# EAGLE board Xonik Waveshaper v2.3 (EAGLE 9.6.2)
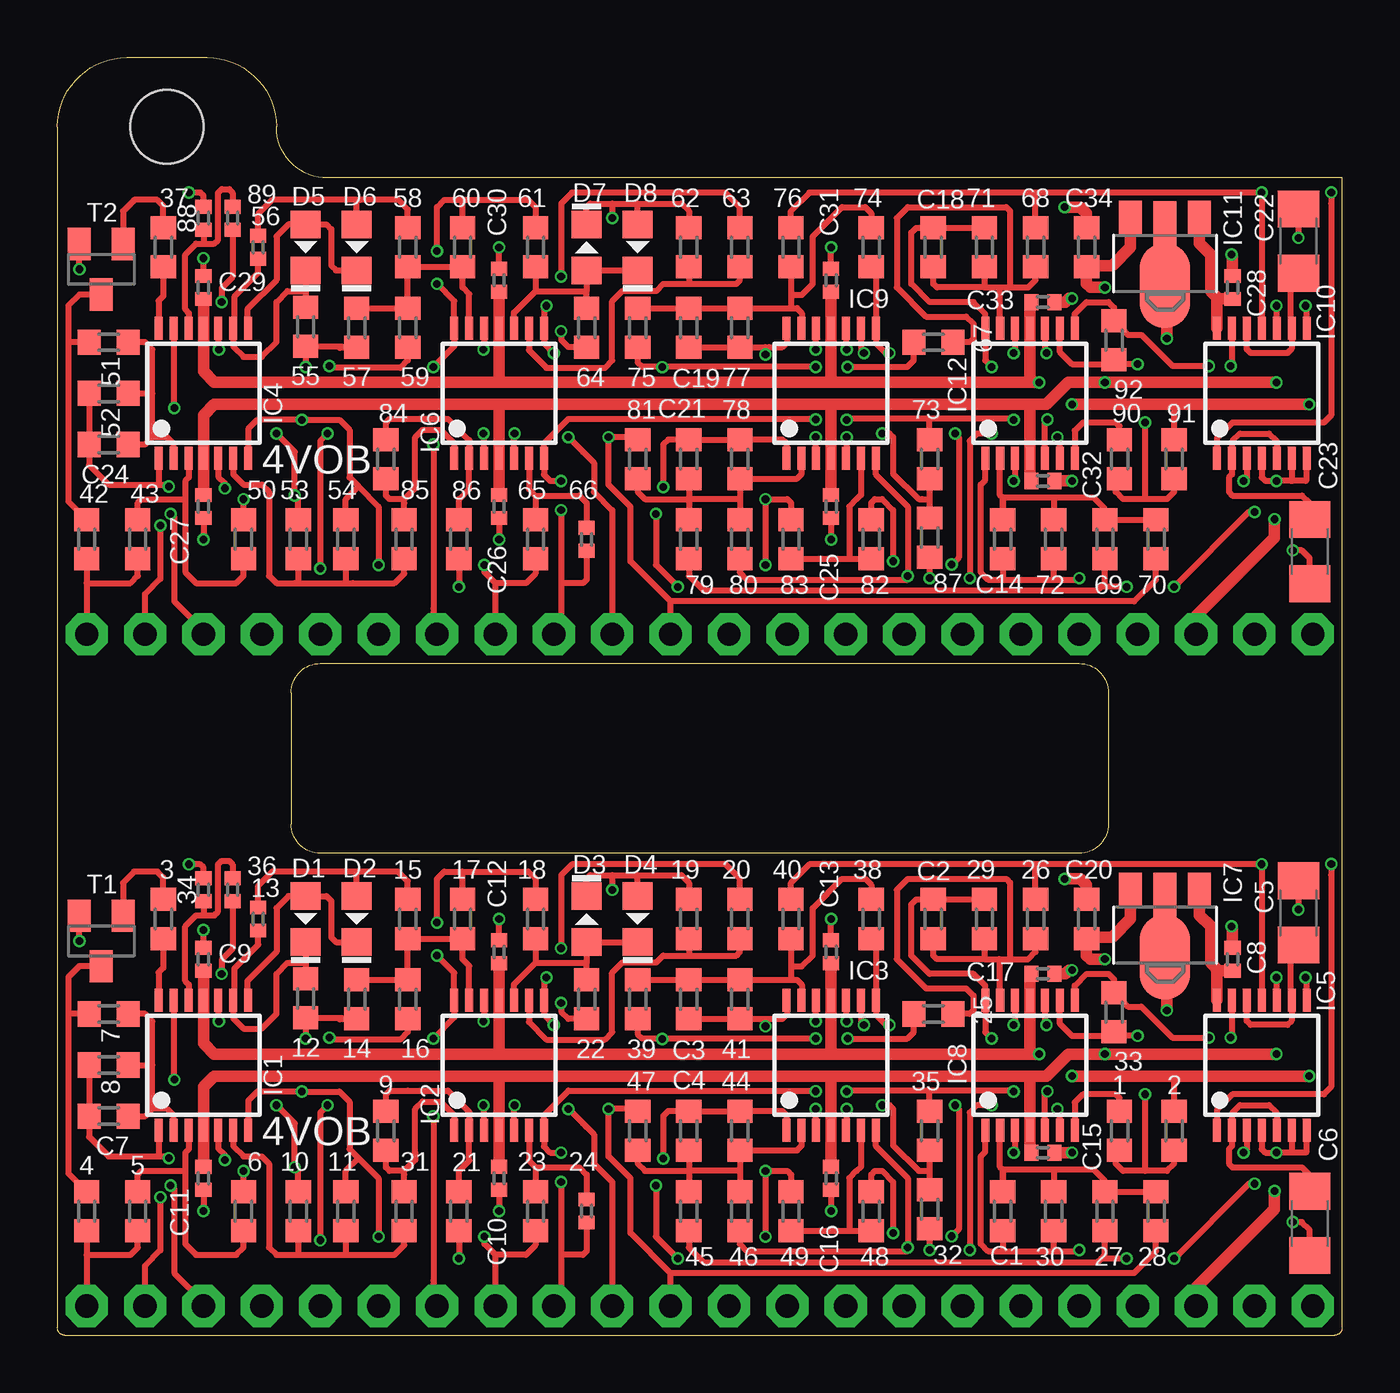
[diagram p0: board, top side]
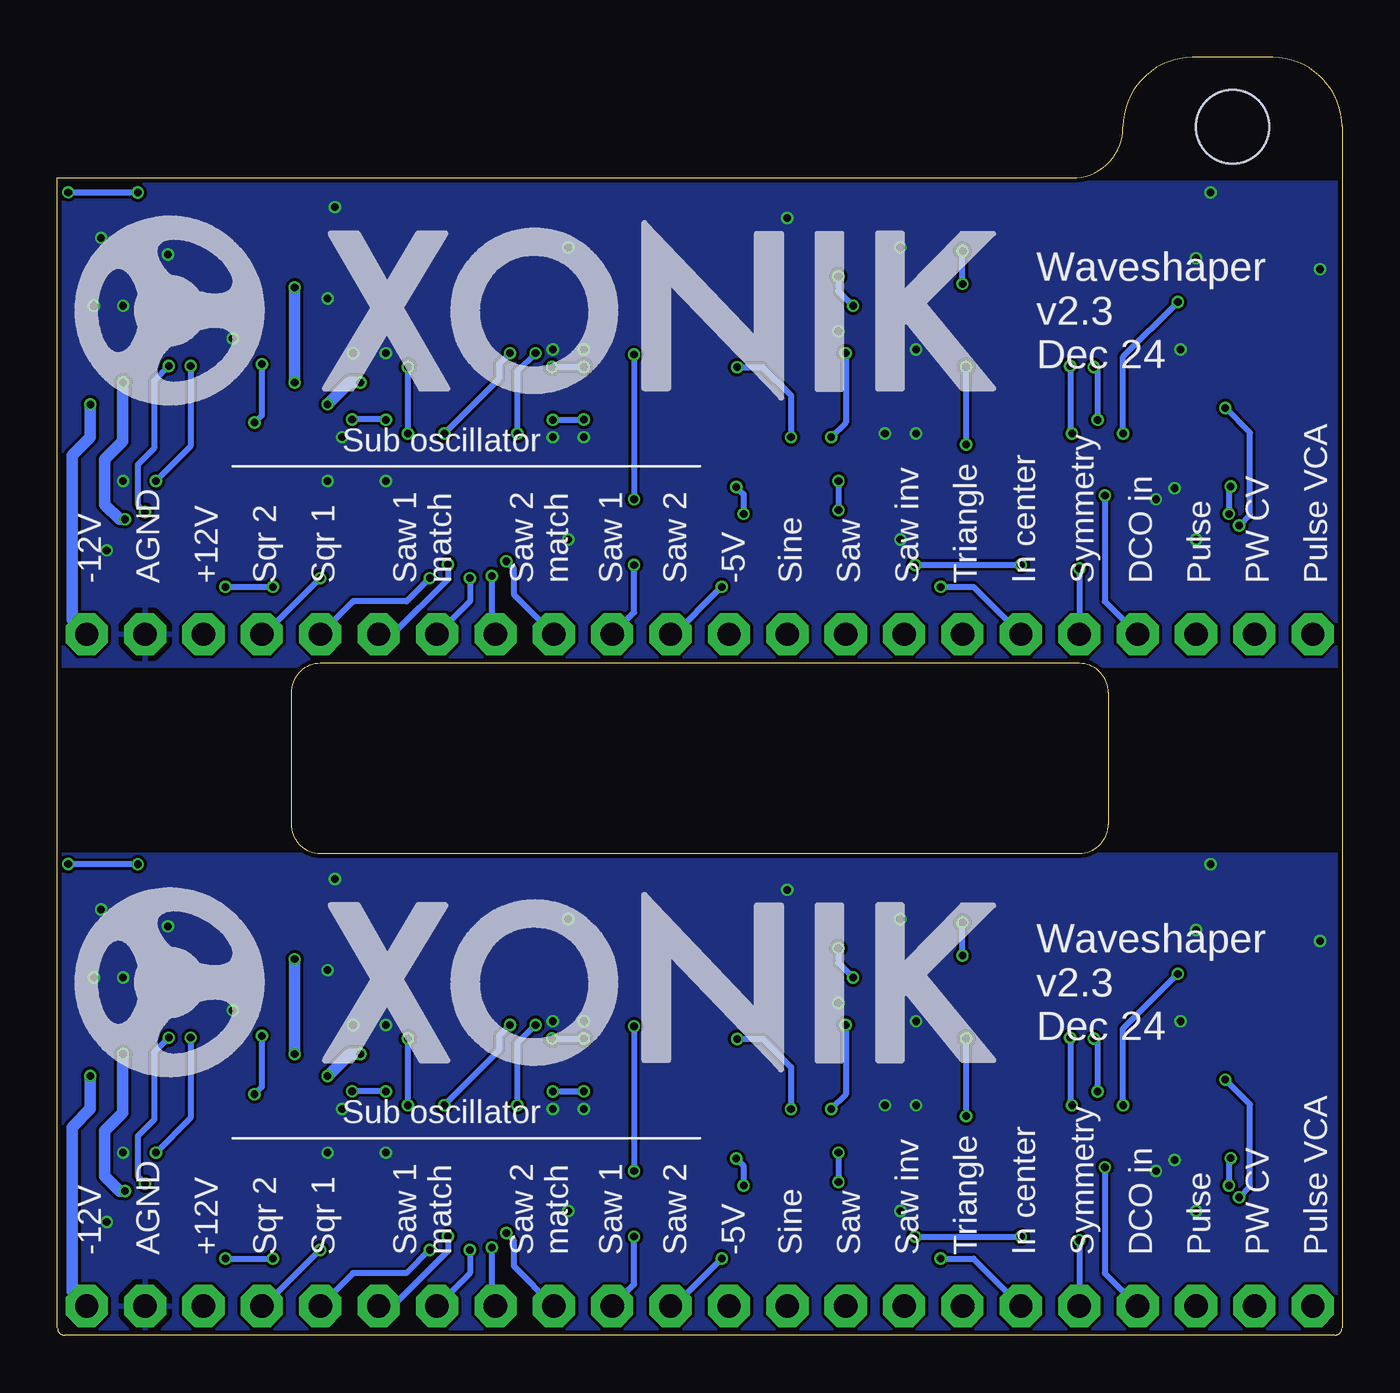
[diagram p1: board, bottom side, seen from below]

Size 55.88 x 55.56 mm. Coordinates in mm from the lower left corner, seen from the top.
Outline: 0.32,0 55.56,0 arc90 55.88,0.32 55.88,50.32 11.75,50.32 arc-90 9.53,52.55 arc90 6.51,55.56 3.02,55.56 arc90 0,52.55 0,0.32 arc90 0.32,0
Outline: 44.45,20.95 11.43,20.95 arc-90 10.16,22.23 10.16,27.94 arc-90 11.43,29.21 44.45,29.21 arc-90 45.72,27.94 45.72,22.23 arc-90 44.45,20.95
Copper layers (1*16): Top 0.035mm / dielectric 1.6mm / Bottom 0.035mm
Design rules "jlcpcb-2layers *": minimum track width 5mil, minimum drill 0.3mm, track to track 5mil, track to pad 5mil, pad to pad 5mil, via to via 5mil, smd to smd 5mil, copper to edge 0.2mm, drill to drill 6mil, minimum pad ring 10mil, minimum via ring 4mil, stop-mask expansion 4mil, vias tented up to drill 0mil, thermal gap 10mil
Holes 3.2 mm at 4.76,52.55

## Footprints (pad centres in the part's own frame; a part is rotated, then mirrored left to right if it is on the bottom)
R0603 = smd 1 x 1.1: 1 -0.85,0; 2 0.85,0
R0402 = smd 0.6 x 0.7: 1 -0.5,0; 2 0.5,0
C0603-J = smd 1 x 1.1: 1 -0.85,0; 2 0.85,0
C1206 = smd 1.6 x 1.8: 1 -1.4,0; 2 1.4,0
C0402-J = smd 0.6 x 0.7: 1 -0.5,0; 2 0.5,0
D0805-J = smd 1.2 x 1.3: A 1,0; C -1,0
TSSOP14J = smd 0.35 x 1: 1 -1.95,-2.825; 2 -1.3,-2.825; 3 -0.65,-2.825; 4 0,-2.825; 5 0.65,-2.825; 6 1.3,-2.825; 7 1.95,-2.825; 8 1.95,2.825; 9 1.3,2.825; 10 0.65,2.825; 11 0,2.825; 12 -0.65,2.825; 13 -1.3,2.825; 14 -1.95,2.825
SOT89 = smd 1 x 1.5: 1 -1.499,-1.981; 3 1.499,-1.981 | smd 1 x 2: 2 0,-1.727 | smd 2.2 x 3.7: 2@1 0,0.94
SOT23-BEC = smd 1 x 1.4: B -0.95,-1.1; C 0,1.1; E 0.95,-1.1
MA22N-1J = drill 1.016 octagon: 1 -26.67,0; 2 -24.13,0; 3 -21.59,0; 4 -19.05,0; 5 -16.51,0; 6 -13.97,0; 7 -11.43,0; 8 -8.89,0; 9 -6.35,0; 10 -3.81,0; 11 -1.27,0; 12 1.27,0; 13 3.81,0; 14 6.35,0; 15 8.89,0; 16 11.43,0; 17 13.97,0; 18 16.51,0; 19 19.05,0; 20 21.59,0; 21 24.13,0; 22 26.67,0

## Placement (x,y rotation side)
1  100k  [R0603]  46.2,8.89 270 top
2  100k  [R0603]  48.58,8.89 270 top
3  68k  [R0603]  4.6,18.1 270 top
4  1k  [R0603]  1.27,5.4 270 top
5  200k  [R0603]  3.49,5.4 270 top
6  100k  [R0603]  8.1,5.4 90 top
7  100k  [R0603]  2.22,13.97 0 top
8  200k  [R0603]  2.22,11.75 180 top
9  30k  [R0603]  14.29,8.89 270 top
10  27k  [R0603]  10.48,5.4 270 top
11  27k  [R0603]  12.54,5.4 90 top
12  100k  [R0603]  10.79,14.64 90 top
13  100k  [R0402]  8.73,18.1 90 top
14  100k  [R0603]  13.02,14.61 90 top
15  50k  [R0603]  15.24,18.1 90 top
16  100k  [R0603]  15.24,14.61 270 top
17  200k  [R0603]  17.62,18.1 270 top
18  150k  [R0603]  20.8,18.1 90 top
19  1k2  [R0603]  27.46,18.1 90 top
20  15k  [R0603]  29.69,18.1 270 top
21  15k  [R0603]  17.46,5.4 90 top
22  22k  [R0603]  23.02,14.61 270 top
23  100k  [R0603]  20.8,5.4 90 top
24  100k  [R0402]  23.02,5.4 270 top
25  20k  [R0603]  38.1,13.97 0 top
26  10k  [R0603]  42.55,18.1 270 top
27  10k  [R0603]  45.56,5.4 90 top
28  20k  [R0603]  47.78,5.4 90 top
29  20k  [R0603]  40.32,18.1 90 top
30  20k  [R0603]  43.34,5.4 270 top
31  27k  [R0603]  15.08,5.4 270 top
32  33k  [R0603]  37.94,5.48 270 top
33  20k  [R0603]  45.96,14.05 90 top
34  100k  [R0402]  6.35,19.37 90 top
35  100k  [R0603]  37.94,8.89 270 top
36  100k  [R0402]  7.62,19.37 90 top
37  68k  [R0603]  4.6,47.31 270 top
38  49.9k  [R0603]  35.4,18.1 270 top
39  100k  [R0603]  25.24,14.61 270 top
40  50k  [R0603]  31.91,18.1 270 top
41  49.9k  [R0603]  29.69,14.61 270 top
42  1k  [R0603]  1.27,34.61 270 top
43  200k  [R0603]  3.49,34.61 270 top
44  49.9k  [R0603]  29.69,8.89 90 top
45  50k  [R0603]  27.46,5.4 270 top
46  49.9k  [R0603]  29.69,5.4 270 top
47  100k  [R0603]  25.24,8.89 90 top
48  33k  [R0603]  35.4,5.4 270 top
49  100k  [R0603]  31.91,5.4 270 top
50  100k  [R0603]  8.1,34.61 90 top
51  100k  [R0603]  2.22,43.18 0 top
52  200k  [R0603]  2.22,40.96 180 top
53  27k  [R0603]  10.48,34.61 270 top
54  27k  [R0603]  12.54,34.61 90 top
55  100k  [R0603]  10.79,43.85 90 top
56  100k  [R0402]  8.73,47.31 90 top
57  100k  [R0603]  13.02,43.81 90 top
58  50k  [R0603]  15.24,47.31 90 top
59  100k  [R0603]  15.24,43.81 270 top
60  200k  [R0603]  17.62,47.31 270 top
61  150k  [R0603]  20.8,47.31 90 top
62  1k2  [R0603]  27.46,47.31 90 top
63  15k  [R0603]  29.69,47.31 270 top
64  22k  [R0603]  23.02,43.81 270 top
65  100k  [R0603]  20.8,34.61 90 top
66  100k  [R0402]  23.02,34.61 270 top
67  20k  [R0603]  38.1,43.18 0 top
68  10k  [R0603]  42.55,47.31 270 top
69  10k  [R0603]  45.56,34.61 90 top
70  20k  [R0603]  47.78,34.61 90 top
71  20k  [R0603]  40.32,47.31 90 top
72  20k  [R0603]  43.34,34.61 270 top
73  100k  [R0603]  37.94,38.1 270 top
74  49.9k  [R0603]  35.4,47.31 270 top
75  100k  [R0603]  25.24,43.81 270 top
76  50k  [R0603]  31.91,47.31 270 top
77  49.9k  [R0603]  29.69,43.81 270 top
78  49.9k  [R0603]  29.69,38.1 90 top
79  50k  [R0603]  27.46,34.61 270 top
80  49.9k  [R0603]  29.69,34.61 270 top
81  100k  [R0603]  25.24,38.1 90 top
82  33k  [R0603]  35.4,34.61 270 top
83  100k  [R0603]  31.91,34.61 270 top
84  30k  [R0603]  14.29,38.1 270 top
85  27k  [R0603]  15.08,34.61 270 top
86  15k  [R0603]  17.46,34.61 90 top
87  33k  [R0603]  37.94,34.69 270 top
88  100k  [R0402]  6.35,48.58 90 top
89  100k  [R0402]  7.62,48.58 90 top
90  100k  [R0603]  46.2,38.1 270 top
91  100k  [R0603]  48.58,38.1 270 top
92  20k  [R0603]  45.96,43.26 90 top
C1  10pF  [C0603-J]  41.12,5.4 270 top
C2  10pF  [C0603-J]  38.1,18.1 90 top
C3  30pF  [C0603-J]  27.46,14.61 270 top
C4  30pF  [C0603-J]  27.46,8.89 90 top
C5  100nF  [C1206]  53.98,18.36 270 top
C6  100nF  [C1206]  54.48,4.86 90 top
C7  3pF  [C0603-J]  2.22,9.53 180 top
C8  1uF  [C0402-J]  51.12,16.35 270 top
C9  1uF  [C0402-J]  6.35,16.35 90 top
C10  1uF  [C0402-J]  19.21,6.83 90 top
C11  1uF  [C0402-J]  6.35,6.83 90 top
C12  1uF  [C0402-J]  19.21,16.67 90 top
C13  1uF  [C0402-J]  33.66,16.67 90 top
C14  10pF  [C0603-J]  41.12,34.61 270 top
C15  1uF  [C0402-J]  42.86,7.94 180 top
C16  1uF  [C0402-J]  33.66,6.83 90 top
C17  1uF  [C0402-J]  42.86,15.72 0 top
C18  10pF  [C0603-J]  38.1,47.31 90 top
C19  30pF  [C0603-J]  27.46,43.81 270 top
C20  0.33uF  [C0603-J]  44.77,18.1 270 top
C21  30pF  [C0603-J]  27.46,38.1 90 top
C22  100nF  [C1206]  53.98,47.57 270 top
C23  100nF  [C1206]  54.48,34.07 90 top
C24  3pF  [C0603-J]  2.22,38.73 180 top
C25  1uF  [C0402-J]  33.66,36.04 90 top
C26  1uF  [C0402-J]  19.21,36.04 90 top
C27  1uF  [C0402-J]  6.35,36.04 90 top
C28  1uF  [C0402-J]  51.12,45.56 270 top
C29  1uF  [C0402-J]  6.35,45.56 90 top
C30  1uF  [C0402-J]  19.21,45.88 90 top
C31  1uF  [C0402-J]  33.66,45.88 90 top
C32  1uF  [C0402-J]  42.86,37.15 180 top
C33  1uF  [C0402-J]  42.86,44.93 0 top
C34  0.33uF  [C0603-J]  44.77,47.31 270 top
D1  1N41480805  [D0805-J]  10.79,18.1 90 top
D2  1N41480805  [D0805-J]  13.02,18.1 90 top
D3  1N41480805  [D0805-J]  23.02,18.1 270 top
D4  1N41480805  [D0805-J]  25.24,18.1 90 top
D5  1N41480805  [D0805-J]  10.79,47.31 90 top
D6  1N41480805  [D0805-J]  13.02,47.31 90 top
D7  1N41480805  [D0805-J]  23.02,47.31 270 top
D8  1N41480805  [D0805-J]  25.24,47.31 90 top
IC1  TL074JT  [TSSOP14J]  6.35,11.75 0 top
IC2  TL074JT  [TSSOP14J]  19.21,11.75 0 top
IC3  TL074JT  [TSSOP14J]  33.66,11.75 0 top
IC4  TL074JT  [TSSOP14J]  6.35,40.96 0 top
IC5  4013T  [TSSOP14J]  52.39,11.75 0 top
IC6  TL074JT  [TSSOP14J]  19.21,40.96 0 top
IC7  78L05F  [SOT89]  48.18,17.38 180 top
IC8  TL074JT  [TSSOP14J]  42.31,11.75 0 top
IC9  TL074JT  [TSSOP14J]  33.66,40.96 0 top
IC10  4013T  [TSSOP14J]  52.39,40.96 0 top
IC11  78L05F  [SOT89]  48.18,46.59 180 top
IC12  TL074JT  [TSSOP14J]  42.31,40.96 0 top
T1  2n3904  [SOT23-BEC]  1.91,17.14 180 top
T2  2n3904  [SOT23-BEC]  1.91,46.35 180 top
U$1  [XONIK_LOGO_40]  55.09,11.27 0 bottom
U$2  [XONIK_LOGO_40]  55.09,40.48 0 bottom
X1  [MA22N-1J]  27.94,1.27 0 top
X2  [MA22N-1J]  27.94,30.48 0 top

## Library data of the parts
1-92 = rcl; SPICEPREFIX: R
C1-C4 C7-C21 C24-C34 D1-D8 IC1-IC6 IC8-IC10 IC12 U$1 U$2 X1 X2 = joakim
C5 C6 C22 C23 = rcl; SPICEPREFIX: C
IC7 IC11 = linear
T1 T2 = transistor-neu-to92

## Nets
+5V: C8.2 IC5.14 IC7.1
+5V1: C28.2 IC10.14 IC11.1
+12V: C10.2 C11.2 C15.2 C16.2 C20.2 IC1.4 IC2.4 IC3.4 IC7.3 IC8.4 X1.20
+12V1: C25.2 C26.2 C27.2 C32.2 C34.2 IC4.4 IC6.4 IC9.4 IC11.3 IC12.4 X2.20
-5V: 25.1 28.1 39.2 47.2 X1.11
-5V1: 67.1 70.1 75.2 81.2 X2.11
-12V: 2.1 C9.1 C12.1 C13.1 C17.1 IC1.11 IC2.11 IC3.11 IC8.11 X1.22
-12V1: 91.1 C29.1 C30.1 C31.1 C33.1 IC4.11 IC6.11 IC9.11 IC12.11 X2.22
AMP_CV: 4.2 5.2 X1.1
AMP_CV1: 42.2 43.2 X2.1
DCO_IN: 10.1 36.1 X1.4
DCO_IN1: 53.1 89.1 X2.4
GND: 6.2 19.2 22.2 34.2 C5.1 C6.1 C8.1 C9.2 C10.1 C11.1 C12.2 C13.2 C15.1 C16.1 C17.2 C20.1 D3.C D4.A IC1.5 IC1.10 IC2.3 IC2.5 IC2.12 IC3.3 IC3.5 IC3.10 IC3.12 IC5.4 IC5.6 IC5.7 IC5.8 IC5.10 IC7.2 IC7.2@1 IC8.3 IC8.6 IC8.10 IC8.12 T1.E X1.21
GND1: 50.2 62.2 64.2 88.2 C22.1 C23.1 C25.1 C26.1 C27.1 C28.1 C29.2 C30.2 C31.2 C32.1 C33.2 C34.1 D7.C D8.A IC4.5 IC4.10 IC6.3 IC6.5 IC6.12 IC9.3 IC9.5 IC9.10 IC9.12 IC10.4 IC10.6 IC10.7 IC10.8 IC10.10 IC11.2 IC11.2@1 IC12.3 IC12.6 IC12.10 IC12.12 T2.E X2.21
IN_CENTER: 21.1 X1.6
IN_CENTER1: 86.1 X2.6
INV_SAW: 11.2 12.1 14.1 23.1 IC1.7 X1.8
INV_SAW1: 54.2 55.1 57.1 65.1 IC4.7 X2.8
N$1: 9.1 21.2 IC2.2
N$2: 3.2 IC1.14
N$3: 3.1 T1.B
N$4: 4.1 7.1 T1.C
N$5: 5.1 6.1 IC1.3
N$6: 7.2 8.1 C7.1 IC1.2
N$7: 1.1 IC8.7
N$8: 34.1 36.2 IC1.12
N$9: 1.2 2.2 33.1 IC8.9
N$10: 10.2 11.1 31.2 IC1.6
N$11: 12.2 13.1 D1.C IC1.9
N$12: D1.A D2.C IC1.8
N$13: 13.2 15.2 D2.A
N$14: 14.2 15.1 16.1 17.2 IC2.13
N$15: 23.2 24.1 IC2.6
N$16: 37.2 IC4.14
N$17: 33.2 IC5.3 IC8.8
N$18: 37.1 T2.B
N$19: 25.2 26.2 29.1 C2.1 IC8.13
N$20: 42.1 51.1 T2.C
N$21: 48.2 49.2 IC3.6
N$22: 27.2 28.2 30.1 C1.1 IC8.2
N$23: 43.1 50.1 IC4.3
N$24: 32.1 35.2 IC3.9
N$25: 51.2 52.1 C24.1 IC4.2
N$26: 38.1 39.1 40.2 41.1 C3.1 IC3.13
N$27: 53.2 54.1 85.2 IC4.6
N$28: 55.2 56.1 D5.C IC4.9
N$29: 44.1 45.1 46.1 47.1 C4.1 IC3.2
N$30: D5.A D6.C IC4.8
N$31: C6.2 IC5.2 IC5.5
N$32: 26.1 40.1 IC5.1 IC5.11
N$33: 56.2 58.2 D6.A
N$34: C5.2 IC5.9 IC5.12
N$35: 27.1 45.2 IC5.13
N$36: 19.1 20.2 IC2.9
N$37: 57.2 58.1 59.1 60.2 IC6.13
N$38: 65.2 66.1 IC6.6
N$39: 18.1 22.1 D3.A D4.C IC2.10
N$40: 67.2 68.2 71.1 C18.1 IC12.13
N$41: 69.2 70.2 72.1 C14.1 IC12.2
N$42: 9.2 31.1 IC2.1
N$43: 73.2 87.1 IC9.9
N$44: 74.1 75.1 76.2 77.1 C19.1 IC9.13
N$45: 82.2 83.2 IC9.6
N$46: 78.1 79.1 80.1 81.1 C21.1 IC9.2
N$47: C23.2 IC10.2 IC10.5
N$48: 68.1 76.1 IC10.1 IC10.11
N$49: C22.2 IC10.9 IC10.12
N$50: 69.1 79.2 IC10.13
N$51: 61.1 64.1 D7.A D8.C IC6.10
N$52: 62.1 63.2 IC6.9
N$53: 84.1 86.2 IC6.2
N$54: 84.2 85.1 IC6.1
N$55: 88.1 89.2 IC4.12
N$56: 90.2 91.2 92.1 IC12.9
N$57: 92.2 IC10.3 IC12.8
N$58: 90.1 IC12.7
PULSE: 8.2 C7.2 IC1.1 X1.3
PULSE1: 52.2 C24.2 IC4.1 X2.3
PW_CV: IC1.13 X1.2
PW_CV1: IC4.13 X2.2
SAW: 24.2 35.1 IC2.7 IC8.5 X1.9
SAW1: 66.2 73.1 IC6.7 IC12.5 X2.9
SINE: 20.1 IC2.8 X1.10
SINE1: 63.1 IC6.8 X2.10
SS1_TRIM_L: 32.2 X1.16
SS1_TRIM_L1: 87.2 X2.16
SS1_TRIM_R: 38.2 IC3.8 X1.17
SS1_TRIM_R1: 74.2 IC9.8 X2.17
SS2_TRIM_L: 48.1 X1.14
SS2_TRIM_L1: 82.1 X2.14
SS2_TRIM_R: 46.2 IC3.7 X1.15
SS2_TRIM_R1: 80.2 IC9.7 X2.15
SUB_SAW_1: 41.2 49.1 C3.2 IC3.14 X1.13
SUB_SAW_2: 44.2 C4.2 IC3.1 X1.12
SUB_SAW_3: 77.2 83.1 C19.2 IC9.14 X2.13
SUB_SAW_4: 78.2 C21.2 IC9.1 X2.12
SUB_SQR_1: 29.2 C2.2 IC8.14 X1.18
SUB_SQR_2: 30.2 C1.2 IC8.1 X1.19
SUB_SQR_3: 71.2 C18.2 IC12.14 X2.18
SUB_SQR_4: 72.2 C14.2 IC12.1 X2.19
SYMMETRY: 16.2 X1.5
SYMMETRY1: 59.2 X2.5
TRIANGLE: 17.1 18.2 IC2.14 X1.7
TRIANGLE1: 60.1 61.2 IC6.14 X2.7

## Tracks (layer width: path | path; a pad name or v marks a point on that pad's centre or on a via)
+5V
  Top 0.508: IC7.1 49.68,18.27 50.16,17.78 50.16,16.19 50.51,15.85 | 50.51,15.85 C8.2 | IC5.14 50.44,15.78 50.51,15.85
+5V1
  Top 0.508: IC11.1 49.68,47.48 50.16,46.99 50.16,45.4 50.51,45.06 | 50.51,45.06 C28.2 | IC10.14 50.44,44.99 50.51,45.06
+12V  (via drill 0.33)
  Top 0.508: 19.21,11.27 6.83,11.27 6.35,10.79 IC1.4 C11.2 | 19.21,11.27 33.66,11.27 | 33.66,11.27 42.39,11.27 | 42.39,11.27 43.02,11.27 43.97,12.22 v45.56,12.22 v53.02,12.22 | 19.21,11.27 IC2.4 C10.2 | 33.66,11.27 IC3.4 C16.2 | v52.94,6.27 52.94,5.48 49.53,2.06 X1.20 | 42.39,11.27 42.31,11.19 IC8.4 42.31,7.99 C15.2 | v45.56,16.35 44.93,16.35 44.77,16.51 C20.2 44.82,17.3 45.88,17.3 46.68,18.11 IC7.3
  Bottom 0.508: v53.02,12.22 53.03,12.21 53.03,9.67 53.82,8.89 53.82,6.91 53.18,6.27 v52.94,6.27 | v45.56,16.35 v45.56,12.22
+12V1  (via drill 0.33)
  Top 0.508: 19.21,40.48 6.83,40.48 6.35,40.01 IC4.4 C27.2 | 19.21,40.48 33.66,40.48 | 33.66,40.48 42.39,40.48 | 42.39,40.48 43.02,40.48 43.97,41.43 v45.56,41.43 v53.02,41.43 | 19.21,40.48 IC6.4 C26.2 | 33.66,40.48 IC9.4 C25.2 | v52.94,35.48 52.94,34.69 49.53,31.27 X2.20 | 42.39,40.48 42.31,40.4 IC12.4 42.31,37.2 C32.2 | v45.56,45.56 44.93,45.56 44.77,45.72 C34.2 44.82,46.51 45.88,46.51 46.68,47.32 IC11.3
  Bottom 0.508: v53.02,41.43 53.03,41.42 53.03,38.88 53.82,38.1 53.82,36.12 53.18,35.48 v52.94,35.48 | v45.56,45.56 v45.56,41.43
-5V  (via drill 0.33)
  Top 0.254: 25.4,9.58 47.2 25.14,9.84 v23.97,9.84 23.97,7.78 24.92,6.83 24.92,4.45 26.67,2.7 | 39.2 25.24,13.1 25.44,12.9 v26.31,12.9 | v26.31,12.9 v26.31,12.89 | 28.1 47.78,3.65 46.83,2.7 26.67,2.7 | v32.98,12.9 v26.31,12.9 | 25.1 37.25,13.18 36.97,12.9 v34.37,12.9 | X1.11 26.67,2.7
  Bottom 0.254: v26.31,12.89 25.2,12.89 23.97,11.65 v23.97,9.84 | v34.37,12.9 v32.98,12.9
-5V1  (via drill 0.33)
  Top 0.254: 25.4,38.79 81.2 25.14,39.05 v23.97,39.05 23.97,36.99 24.92,36.04 24.92,33.66 26.67,31.91 | 75.2 25.24,42.31 25.44,42.11 v26.31,42.11 | v26.31,42.11 v26.31,42.1 | 70.1 47.78,32.86 46.83,31.91 26.67,31.91 | v32.98,42.11 v26.31,42.11 | 67.1 37.25,42.39 36.97,42.11 v34.37,42.11 | X2.11 26.67,31.91
  Bottom 0.254: v26.31,42.1 25.2,42.1 23.97,40.87 v23.97,39.05 | v34.37,42.11 v32.98,42.11
-12V  (via drill 0.33)
  Top 0.254: 2.1 48.58,11.11 48.74,11.27
  Top 0.508: v42.7,12.22 42.23,12.22 | 42.23,12.22 33.66,12.22 | 33.66,12.22 19.21,12.22 | 19.21,12.22 6.83,12.22 6.35,12.7 IC1.11 C9.1 | 19.21,12.22 IC2.11 C12.1 | 33.66,12.22 IC3.11 C13.1 | 49.37,11.27 v54.45,11.27 | 49.37,11.27 48.74,11.27 v44.13,11.27 44.16,11.25 | 49.4,11.27 49.37,11.27 | 42.23,12.22 42.31,12.3 IC8.11 42.31,15.66 C17.1
  Bottom 0.508: v44.13,11.27 43.18,12.22 v42.7,12.22 | v54.45,11.27 54.45,9.84 55.24,9.05 55.24,1.91 X1.22
-12V1  (via drill 0.33)
  Top 0.254: 91.1 48.58,40.32 48.74,40.48
  Top 0.508: v42.7,41.43 42.23,41.43 | 42.23,41.43 33.66,41.43 | 33.66,41.43 19.21,41.43 | 19.21,41.43 6.83,41.43 6.35,41.91 IC4.11 C29.1 | 19.21,41.43 IC6.11 C30.1 | 33.66,41.43 IC9.11 C31.1 | 49.37,40.48 v54.45,40.48 | 49.37,40.48 48.74,40.48 v44.13,40.48 44.16,40.46 | 49.4,40.48 49.37,40.48 | 42.23,41.43 42.31,41.51 IC12.11 42.31,44.87 C33.1
  Bottom 0.508: v44.13,40.48 43.18,41.43 v42.7,41.43 | v54.45,40.48 54.45,39.05 55.24,38.26 55.24,31.11 X2.22
AMP_CV
  Top 0.254: 4.2 1.27,3.49 | 1.27,3.49 X1.1 | 1.27,3.49 3.17,3.49 3.49,3.81 5.2
AMP_CV1
  Top 0.254: 42.2 1.27,32.7 | 1.27,32.7 X2.1 | 1.27,32.7 3.17,32.7 3.49,33.02 43.2
DCO_IN  (via drill 0.33)
  Top 0.254: 36.1 7.62,16.8 7.14,16.33 v7.14,15.72 | 10.1 10.48,7.14 v10.32,7.3 10.32,9.21 v9.53,10
  Bottom 0.254: v10.32,7.3 10.32,2.7 X1.4 | v9.53,10 9.53,13.34 v7.14,15.72
DCO_IN1  (via drill 0.33)
  Top 0.254: 89.1 7.62,46.01 7.14,45.54 v7.14,44.93 | 53.1 10.48,36.35 v10.32,36.51 10.32,38.42 v9.53,39.21
  Bottom 0.254: v10.32,36.51 10.32,31.91 X2.4 | v9.53,39.21 9.53,42.55 v7.14,44.93
GND  (via drill 0.33)
  Top 0.254: C11.1 v6.35,5.4 | v0.95,17.14 T1.E | C9.2 v6.35,17.62 | v18.53,13.65 18.56,13.68 IC2.12 | C12.2 v19.21,18.1 | D3.C 23.02,19.84 23.18,20 24.13,20 | 24.13,20 25.24,20 | 25.24,20 27.15,20 27.46,19.68 19.2 | D4.A 25.24,20 | 24.13,20 v24.13,19.37 | C5.1 v53.98,18.51 | IC5.8 54.34,15.51 v54.29,15.56 | IC5.10 53.04,15.54 v53.02,15.56 | C16.1 v33.66,5.4 | C13.2 v33.66,18.1 | C10.1 v19.21,5.4 | v21.91,14.45 21.91,14.07 22.23,13.76 22.2 | IC1.10 7,13.68 v7.03,13.65 | IC1.5 7,8.13 7.29,7.84 v7.29,7.62 | IC2.3 18.56,9.98 v18.53,10 | v19.88,10 19.84,9.96 19.84,8.94 IC2.5 | IC3.10 34.3,13.68 v34.33,13.65 | IC3.12 32.98,14.55 v32.98,13.65 | IC3.3 33.01,9.82 v32.98,9.84 | IC3.5 34.33,8.95 v34.33,9.84 | IC5.6 53.69,7.97 | 53.69,7.97 53.72,7.94 54.29,7.94 54.34,7.98 IC5.7 | C6.1 54.48,4.58 54.13,4.92 v53.74,4.92 | 6.2 v8.1,7.14 | 34.2 6.35,20.34 6.21,20.48 v5.71,20.48 | IC8.3 41.66,8 v41.59,7.94 | IC8.6 43.61,9.73 v43.5,9.84 | IC8.12 41.66,13.56 v41.59,13.49 | IC8.10 42.96,13.56 v43.02,13.49 | 53.69,7.97 53.66,7.94 v53.02,7.94 52.55,7.94 52.39,8.1 IC5.4
  Top 0.508: v44.13,15.88 44,15.88 43.84,15.72 C17.2 | C15.1 v44.13,7.94 | v51.07,17.78 51.12,17.74 C8.1 | C20.1 44.77,19.58 44.51,19.84 v43.81,19.84 | IC7.2@1 48.26,16.36 | 48.26,16.36 v48.26,14.13 | IC7.2 48.26,19.03 48.26,16.36
  pour Bottom: -0.03,20.92 55.98,20.92 55.98,-0.13 -0.03,-0.13
GND1  (via drill 0.33)
  Top 0.254: C27.1 v6.35,34.61 | v0.95,46.35 T2.E | C29.2 v6.35,46.83 | v18.53,42.86 18.56,42.89 IC6.12 | C30.2 v19.21,47.31 | D7.C 23.02,49.05 23.18,49.21 24.13,49.21 | 24.13,49.21 25.24,49.21 | 25.24,49.21 27.15,49.21 27.46,48.9 62.2 | D8.A 25.24,49.21 | 24.13,49.21 v24.13,48.58 | C22.1 v53.98,47.72 | IC10.8 54.34,44.72 v54.29,44.77 | IC10.10 53.04,44.75 v53.02,44.77 | C25.1 v33.66,34.61 | C31.2 v33.66,47.31 | C26.1 v19.21,34.61 | v21.91,43.66 21.91,43.28 22.23,42.97 64.2 | IC4.10 7,42.89 v7.03,42.86 | IC4.5 7,37.34 7.29,37.05 v7.29,36.83 | IC6.3 18.56,39.19 v18.53,39.21 | v19.88,39.21 19.84,39.17 19.84,38.15 IC6.5 | IC9.10 34.3,42.89 v34.33,42.86 | IC9.12 32.98,43.76 v32.98,42.86 | IC9.3 33.01,39.03 v32.98,39.05 | IC9.5 34.33,38.16 v34.33,39.05 | IC10.6 53.69,37.18 | 53.69,37.18 53.72,37.15 54.29,37.15 54.34,37.19 IC10.7 | C23.1 54.48,33.79 54.13,34.13 v53.74,34.13 | 50.2 v8.1,36.35 | 88.2 6.35,49.55 6.21,49.69 v5.71,49.69 | IC12.3 41.66,37.21 v41.59,37.15 | IC12.6 43.61,38.94 v43.5,39.05 | IC12.12 41.66,42.77 v41.59,42.7 | IC12.10 42.96,42.77 v43.02,42.7 | 53.69,37.18 53.66,37.15 v53.02,37.15 52.55,37.15 52.39,37.31 IC10.4
  Top 0.508: v44.13,45.09 44,45.09 43.84,44.93 C33.2 | C32.1 v44.13,37.15 | v51.07,46.99 51.12,46.95 C28.1 | C34.1 44.77,48.79 44.51,49.05 v43.81,49.05 | IC11.2@1 48.26,45.57 | 48.26,45.57 v48.26,43.34 | IC11.2 48.26,48.24 48.26,45.57
  pour Bottom: -0.03,50.13 55.98,50.13 55.98,29.08 -0.03,29.08
IN_CENTER  (via drill 0.33)
  Top 0.254: 17.46,4.76 21.1 v17.46,3.33
  Bottom 0.254: v17.46,3.33 16.03,3.33 X1.6
IN_CENTER1  (via drill 0.33)
  Top 0.254: 17.46,33.97 86.1 v17.46,32.54
  Bottom 0.254: v17.46,32.54 16.03,32.54 X2.6
INV_SAW  (via drill 0.33)
  Top 0.254: 14.1 12.36,13.76 12.29,13.72 12.37,13.79 12.1 10.79,13.02 v10.79,12.9 | 23.1 20.8,3.91 20.38,3.49 19.05,3.49 | 19.05,3.49 18.57,3.97 v18.57,4.29 | IC1.7 8.3,10.21 8.69,10.6 v10.64,10.6 12.26,10.6 12.7,10.16 12.7,8.1 13.1,7.7 | X1.8 19.05,3.49 | 13.1,7.7 13.97,6.83 v13.97,4.29 | 11.2 12.54,7.14 13.1,7.7
  Bottom 0.254: v10.79,12.9 10.64,12.74 v10.64,10.6 | v18.57,4.29 v13.97,4.29
INV_SAW1  (via drill 0.33)
  Top 0.254: 57.1 12.36,42.97 12.29,42.93 12.37,43.01 55.1 10.79,42.23 v10.79,42.11 | 65.1 20.8,33.12 20.38,32.7 19.05,32.7 | 19.05,32.7 18.57,33.18 v18.57,33.5 | IC4.7 8.3,39.41 8.69,39.81 v10.64,39.81 12.26,39.81 12.7,39.37 12.7,37.31 13.1,36.91 | X2.8 19.05,32.7 | 13.1,36.91 13.97,36.04 v13.97,33.5 | 54.2 12.54,36.35 13.1,36.91
  Bottom 0.254: v10.79,42.11 10.64,41.95 v10.64,39.81 | v18.57,33.5 v13.97,33.5
N$1
  Top 0.254: 9.1 14.29,10.48 14.45,10.64 15.24,10.64 16.99,10.64 17.91,9.71 IC2.2 17.91,7.59 17.46,7.14 21.2
N$2
  Top 0.254: 3.2 4.6,15.98 4.4,15.77 IC1.14
N$3
  Top 0.254: 3.1 4.6,19.9 4.34,20.16 3.33,20.16 3.33,20.15 2.85,19.67 T1.B
N$4
  Top 0.254: 0.48,13.97 0.48,15.57 0.95,16.05 T1.C | 0.48,13.97 0.48,7.04 4.1 | 7.1 0.48,13.97
N$5
  Top 0.254: IC1.3 5.71,8.91 5.71,8.1 5.56,7.94 5.56,7.46 | 5.56,7.46 5.56,7.14 3.65,7.14 3.49,6.99 5.1 | 5.56,7.46 5.56,7.3 5.56,3.97 6.03,3.49 7.78,3.49 8.1,3.81 6.1
N$6
  Top 0.254: C7.1 3.81,9.53 4.13,9.84 | 7.2 3.81,13.97 4.13,13.65 4.13,11.75 | 4.13,9.84 4.13,11.75 | 8.1 4.13,11.75 | IC1.2 5.05,9.55 4.76,9.84 4.13,9.84
N$7
  Top 0.254: 1.1 46.2,10.32 46.04,10.48 44.61,10.48 44.26,10.13 IC8.7
N$8
  Top 0.254: 6.35,18.26 6.03,18.26 5.56,17.78 5.56,15.4 5.71,15.24 5.71,14.59 IC1.12 | 6.35,18.26 6.83,18.26 6.99,18.41 6.99,20.47 7.14,20.63 7.47,20.63 7.62,20.48 36.2 | 34.1 6.35,18.26
N$9  (via drill 0.33)
  Top 0.254: IC8.9 43.61,13.54 44.13,13.02 45.78,13.02 45.86,13.1 | 45.86,13.1 45.86,13.04 | v46.99,13.02 45.94,13.02 | 45.94,13.02 45.86,13.1 | 2.2 48.58,7.46 48.26,7.14 47.31,7.14 | v47.31,10.48 47.31,7.14 | 47.31,7.14 46.35,7.14 46.04,7.46 46.04,7.88 1.2 | 33.1 45.96,13.04 45.94,13.02
  Bottom 0.254: v46.99,13.02 46.99,10.79 v47.31,10.48
N$10
  Top 0.254: 10.48,3.49 10.32,3.49 9.53,3.49 9.21,3.81 9.21,7.46 8.89,7.78 8.1,7.78 7.65,8.22 IC1.6 | 10.48,3.49 12.54,3.49 | 12.54,3.49 14.66,3.49 15.08,3.91 31.2 | 12.54,3.49 12.86,3.49 | 10.2 10.48,3.49 | 11.1 12.54,3.49
N$11
  Top 0.254: 13.1 8.73,16.99 7.69,15.95 7.69,14.61 IC1.9 7.65,13.78 8.1,13.34 8.89,13.34 9.53,13.97 9.53,15.72 10,16.19 10.48,16.19 10.79,16.19 | D1.C 10.79,16.19 | 10.79,16.19 12.2
N$12
  Top 0.254: D2.C 12.11,17.1 11.91,17.3 11.91,18.89 11.7,19.1 D1.A 10.05,19.1 9.53,18.57 9.53,16.67 8.26,15.4 8.26,14.62 IC1.8
N$13
  Top 0.254: 13.02,20.16 13.18,20.16 14.82,20.16 15.24,19.74 15.2 | 13.02,20.16 9.34,20.16 8.73,19.55 13.2 | D2.A 13.02,20.16
N$14
  Top 0.254: IC2.13 17.91,16.06 17.62,16.35 17.2 | 17.94,16.93 17.2 | 14.2 16.1 15.1 17.2
N$15
  Top 0.254: IC2.6 20.51,7.59 20.8,7.3 | 20.8,7.3 23.2 | 24.1 23.02,6.99 22.7,7.3 20.8,7.3
N$16
  Top 0.254: 37.2 4.6,45.19 4.4,44.98 IC4.14
N$17  (via drill 0.33)
  Top 0.254: IC8.8 44.26,15.21 44.77,15.72 45.72,15.72 45.96,15.48 33.2 46.57,14.29 47.15,14.29 48.5,12.94 v50.09,12.94 | v51.59,7.94 51.75,8.1 51.75,8.91 IC5.3
  Bottom 0.254: v50.09,12.94 50.09,9.45 v51.59,7.94
N$18
  Top 0.254: 37.1 4.6,49.11 4.34,49.37 3.33,49.37 3.33,49.36 2.85,48.88 T2.B
N$19
  Top 0.254: 29.1 40.32,16.35 | 40.32,16.35 40.96,16.35 | 40.96,16.35 41.43,16.35 | 41.43,16.35 42.23,16.35 42.55,16.67 26.2 | 41.43,16.35 41.43,19.68 41.27,19.84 36.99,19.84 36.51,19.37 36.51,16.35 37.78,15.08 39.53,15.08 39.85,14.76 39.85,14.13 39.69,13.97 25.2 | IC8.13 41.01,16.3 40.96,16.35 | C2.1 38.1,16.51 38.26,16.35 40.32,16.35
N$20
  Top 0.254: 0.48,43.18 0.48,44.78 0.95,45.26 T2.C | 0.48,43.18 0.48,36.25 42.1 | 51.1 0.48,43.18
N$21
  Top 0.254: IC3.6 34.95,7.33 34.77,7.14 34.45,6.83 34.45,4.55 | 49.2 34.45,4.55 | 34.45,4.55 48.2
N$22
  Top 0.254: 41.17,6.3 C1.1 | 43.34,7.2 30.1 | 43.34,7.2 41.12,7.2 | C1.1 41.12,7.2 | 43.34,7.2 45.09,7.2 45.56,6.72 27.2 28.2 | 41.12,7.23 C1.1 | 41.12,7.2 41.01,7.31 IC8.2
N$23
  Top 0.254: IC4.3 5.71,38.12 5.71,37.31 5.56,37.15 5.56,36.67 | 5.56,36.67 5.56,36.35 3.65,36.35 3.49,36.2 43.1 | 5.56,36.67 5.56,36.51 5.56,33.18 6.03,32.7 7.78,32.7 8.1,33.02 50.1
N$24  (via drill 0.33)
  Top 0.254: IC3.9 34.95,13.62 v35.08,13.49 | 36.04,10 v35.88,10 36.2,10 36.35,9.84 36.35,8.26 37.47,7.14 37.62,7.14 37.94,7.14 | 37.94,8.26 37.94,8.1 | 37.94,8.1 37.94,7.14 | 37.94,7.14 32.1 | 35.2 37.94,8.1
  Bottom 0.254: v35.08,13.49 35.88,12.7 v35.88,10
N$25
  Top 0.254: C24.1 3.81,38.73 4.13,39.05 | 51.2 3.81,43.18 4.13,42.86 4.13,40.96 | 4.13,39.05 4.13,40.96 | 52.1 4.13,40.96 | IC4.2 5.05,38.77 4.76,39.05 4.13,39.05
N$26
  Top 0.254: 31.91,15.46 41.1 C3.1 39.1 | 31.91,15.46 32.17,15.46 32.38,15.24 32.38,14.6 IC3.13 | 40.2 31.91,16.03 | 31.91,16.03 31.91,15.46 | 31.91,16.03 32.38,16.03 32.86,16.51 32.86,18.57 34.13,19.84 35.14,19.84 35.4,19.58 38.1
N$27
  Top 0.254: 10.48,32.7 10.32,32.7 9.53,32.7 9.21,33.02 9.21,36.67 8.89,36.99 8.1,36.99 7.65,37.44 IC4.6 | 10.48,32.7 12.54,32.7 | 12.54,32.7 14.66,32.7 15.08,33.12 85.2 | 12.54,32.7 12.86,32.7 | 53.2 10.48,32.7 | 54.1 12.54,32.7
N$28
  Top 0.254: 56.1 8.73,46.2 7.69,45.16 7.69,43.82 IC4.9 7.65,42.99 8.1,42.55 8.89,42.55 9.53,43.18 9.53,44.93 10,45.4 10.48,45.4 10.79,45.4 | D5.C 10.79,45.4 | 10.79,45.4 55.2
N$29
  Top 0.254: IC3.2 32.38,8.89 32.38,8.26 32.17,8.04 44.1 29.69,7.14 | C4.1 27.46,7.14 | 27.46,7.14 45.1 | 29.69,7.14 46.1 | 29.69,7.14 27.46,7.14 | 47.1 25.24,7.46 25.56,7.14 27.46,7.14
N$30
  Top 0.254: D6.C 12.11,46.31 11.91,46.51 11.91,48.1 11.7,48.31 D5.A 10.05,48.31 9.53,47.78 9.53,45.88 8.26,44.61 8.26,43.83 IC4.8
N$31
  Top 0.254: IC5.5 53.04,9.67 52.7,10 51.44,10 51.12,9.68 51.12,8.95 IC5.2 51.09,8.22 50.96,8.1 50.96,7.46 51.12,7.3 54.13,7.3 54.48,6.96 C6.2
N$32  (via drill 0.33)
  Top 0.254: 40.1 31.91,19.68 32.7,20.48 42.55,20.48 | 42.55,20.48 v52.39,20.48 IC5.11 | IC5.1 50.44,9.8 51.12,10.48 55.09,10.48 55.4,10.79 55.4,20 55.41,20.01 v55.41,20.49 | 26.1 42.55,20.48
  Bottom 0.254: v52.39,20.48 55.4,20.48 v55.41,20.49
N$33
  Top 0.254: 13.02,49.37 13.18,49.37 14.82,49.37 15.24,48.95 58.2 | 13.02,49.37 9.34,49.37 8.73,48.76 56.2 | D6.A 13.02,49.37
N$34
  Top 0.254: C5.2 53.66,16.86 53.66,14.6 IC5.9 53.69,13.68 53.5,13.49 51.91,13.49 51.74,13.67 IC5.12
N$35  (via drill 0.33)
  Top 0.254: 45.2 27.46,3.81 28.1,3.17 45.24,3.17 45.4,3.33 | IC5.13 51.09,12.99 v51.04,12.94 | v46.51,3.33 45.4,3.33 | 45.4,3.33 45.56,3.49 27.1 | v52.07,6.59 51.83,6.59 v48.58,3.33
  Bottom 0.254: v52.07,6.59 52.39,6.91 52.39,8.65 51.67,9.37 51.67,12.3 v51.04,12.94 | v48.58,3.33 v46.51,3.33
N$36
  Top 0.254: IC2.9 20.51,13.62 21.27,12.86 23.81,12.86 24.13,13.18 24.13,15.75 24.59,16.21 26.05,16.21 26.35,16.51 27.46,16.51 | 20.2 29.69,16.67 29.53,16.51 27.46,16.51 | 19.1 27.46,16.51
N$37
  Top 0.254: IC6.13 17.91,45.27 17.62,45.56 60.2 | 17.94,46.14 60.2 | 57.2 59.1 58.1 60.2
N$38
  Top 0.254: IC6.6 20.51,36.8 20.8,36.51 | 20.8,36.51 65.2 | 66.1 23.02,36.2 22.7,36.51 20.8,36.51
N$39
  Top 0.254: IC2.10 19.86,15.26 20.4,15.8 20.8,16.19 | 18.1 20.8,16.19 | 20.8,16.19 23.02,16.19 | 23.02,16.19 D3.A D4.C | 22.1 23.02,16.19
N$40
  Top 0.254: 71.1 40.32,45.56 | 40.32,45.56 40.96,45.56 | 40.96,45.56 41.43,45.56 | 41.43,45.56 42.23,45.56 42.55,45.88 68.2 | 41.43,45.56 41.43,48.9 41.27,49.05 36.99,49.05 36.51,48.58 36.51,45.56 37.78,44.29 39.53,44.29 39.85,43.97 39.85,43.34 39.69,43.18 67.2 | IC12.13 41.01,45.51 40.96,45.56 | C18.1 38.1,45.72 38.26,45.56 40.32,45.56
N$41
  Top 0.254: 41.17,35.51 C14.1 | 43.34,36.41 72.1 | 43.34,36.41 41.12,36.41 | C14.1 41.12,36.41 | 43.34,36.41 45.09,36.41 45.56,35.93 69.2 70.2 | 41.12,36.44 C14.1 | 41.12,36.41 41.01,36.52 IC12.2
N$42
  Top 0.254: 15.56,7.78 15.56,7.94 | 15.56,7.94 15.56,9.84 15.88,10.16 16.67,10.16 17.26,9.57 IC2.1 | 31.1 15.08,6.99 15.08,7.14 | 15.08,7.14 14.45,7.14 14.29,7.3 9.2 | 15.56,7.94 15.56,7.62 15.08,7.14
N$43  (via drill 0.33)
  Top 0.254: IC9.9 34.95,42.83 v35.08,42.7 | 36.04,39.21 v35.88,39.21 36.2,39.21 36.35,39.05 36.35,37.47 37.47,36.35 37.62,36.35 37.94,36.35 | 37.94,37.47 37.94,37.31 | 37.94,37.31 37.94,36.35 | 37.94,36.35 87.1 | 73.2 37.94,37.31
  Bottom 0.254: v35.08,42.7 35.88,41.91 v35.88,39.21
N$44
  Top 0.254: 31.91,44.66 77.1 C19.1 75.1 | 31.91,44.66 32.17,44.66 32.38,44.45 32.38,43.81 IC9.13 | 76.2 31.91,45.24 | 31.91,45.24 31.91,44.66 | 31.91,45.24 32.38,45.24 32.86,45.72 32.86,47.78 34.13,49.05 35.14,49.05 35.4,48.79 74.1
N$45
  Top 0.254: IC9.6 34.95,36.54 34.77,36.35 34.45,36.04 34.45,33.76 | 83.2 34.45,33.76 | 34.45,33.76 82.2
N$46
  Top 0.254: IC9.2 32.38,38.1 32.38,37.47 32.17,37.25 78.1 29.69,36.35 | C21.1 27.46,36.35 | 27.46,36.35 79.1 | 29.69,36.35 80.1 | 29.69,36.35 27.46,36.35 | 81.1 25.24,36.67 25.56,36.35 27.46,36.35
N$47
  Top 0.254: IC10.5 53.04,38.88 52.7,39.21 51.44,39.21 51.12,38.89 51.12,38.16 IC10.2 51.09,37.44 50.96,37.31 50.96,36.67 51.12,36.51 54.13,36.51 54.48,36.17 C23.2
N$48  (via drill 0.33)
  Top 0.254: 76.1 31.91,48.9 32.7,49.69 42.55,49.69 | 42.55,49.69 v52.39,49.69 IC10.11 | IC10.1 50.44,39.01 51.12,39.69 55.09,39.69 55.4,40.01 55.4,49.21 55.41,49.22 v55.41,49.7 | 68.1 42.55,49.69
  Bottom 0.254: v52.39,49.69 v55.4,49.69 v55.41,49.7
N$49
  Top 0.254: C22.2 53.66,46.08 53.66,43.81 IC10.9 53.69,42.89 53.5,42.7 51.91,42.7 51.74,42.88 IC10.12
N$50  (via drill 0.33)
  Top 0.254: 79.2 27.46,33.02 28.1,32.38 45.24,32.38 45.4,32.54 | IC10.13 51.09,42.2 v51.04,42.15 | v46.51,32.54 45.4,32.54 | 45.4,32.54 45.56,32.7 69.1 | v52.07,35.8 51.83,35.8 v48.58,32.54
  Bottom 0.254: v52.07,35.8 52.39,36.12 52.39,37.86 51.67,38.58 51.67,41.51 v51.04,42.15 | v48.58,32.54 v46.51,32.54
N$51
  Top 0.254: IC6.10 19.86,44.47 20.4,45.01 20.8,45.4 | 61.1 20.8,45.4 | 20.8,45.4 23.02,45.4 | 23.02,45.4 D7.A D8.C | 64.1 23.02,45.4
N$52
  Top 0.254: IC6.9 20.51,42.83 21.27,42.07 23.81,42.07 24.13,42.39 24.13,44.96 24.59,45.42 26.05,45.42 26.35,45.72 27.46,45.72 | 63.2 29.69,45.88 29.53,45.72 27.46,45.72 | 62.1 27.46,45.72
N$53
  Top 0.254: 84.1 14.29,39.69 14.45,39.85 15.24,39.85 16.99,39.85 17.91,38.92 IC6.2 17.91,36.8 17.46,36.35 86.2
N$54
  Top 0.254: 15.56,36.99 15.56,37.15 | 15.56,37.15 15.56,39.05 15.88,39.37 16.67,39.37 17.26,38.78 IC6.1 | 85.1 15.08,36.2 15.08,36.35 | 15.08,36.35 14.45,36.35 14.29,36.51 84.2 | 15.56,37.15 15.56,36.83 15.08,36.35
N$55
  Top 0.254: 6.35,47.47 6.03,47.47 5.56,46.99 5.56,44.61 5.71,44.45 5.71,43.8 IC4.12 | 6.35,47.47 6.83,47.47 6.99,47.62 6.99,49.68 7.14,49.84 7.47,49.84 7.62,49.69 89.2 | 88.1 6.35,47.47
N$56  (via drill 0.33)
  Top 0.254: IC12.9 43.61,42.75 44.13,42.23 45.78,42.23 45.86,42.31 | 45.86,42.31 45.86,42.25 | v46.99,42.23 45.94,42.23 | 45.94,42.23 45.86,42.31 | 91.2 48.58,36.67 48.26,36.35 47.31,36.35 | v47.31,39.69 47.31,36.35 | 47.31,36.35 46.35,36.35 46.04,36.67 46.04,37.09 90.2 | 92.1 45.96,42.25 45.94,42.23
  Bottom 0.254: v46.99,42.23 46.99,40.01 v47.31,39.69
N$57  (via drill 0.33)
  Top 0.254: IC12.8 44.26,44.42 44.77,44.93 45.72,44.93 45.96,44.69 92.2 46.57,43.5 47.15,43.5 48.5,42.15 v50.09,42.15 | v51.59,37.15 51.75,37.31 51.75,38.12 IC10.3
  Bottom 0.254: v50.09,42.15 50.09,38.66 v51.59,37.15
N$58
  Top 0.254: 90.1 46.2,39.53 46.04,39.69 44.61,39.69 44.26,39.34 IC12.7
PULSE  (via drill 0.33)
  Top 0.254: 8.2 C7.2 1.37,8.63 2.22,7.78 4.45,7.78 | v4.84,7.7 4.84,7.78 4.45,7.78 | 4.45,8.88 IC1.1 4.4,7.82 4.45,7.78 | X1.3 6.35,1.43 5.08,2.7 5.08,6.35 v4.92,6.51
  Bottom 0.254: v4.84,7.7 4.92,7.62 v4.92,6.51
PULSE1  (via drill 0.33)
  Top 0.254: 52.2 C24.2 1.37,37.84 2.22,36.99 4.45,36.99 | v4.84,36.91 4.84,36.99 4.45,36.99 | 4.45,38.09 IC4.1 4.4,37.03 4.45,36.99 | X2.3 6.35,30.64 5.08,31.91 5.08,35.56 v4.92,35.72
  Bottom 0.254: v4.84,36.91 4.92,36.83 v4.92,35.72
PW_CV  (via drill 0.33)
  Top 0.254: v5.08,11.11 5.05,11.11 IC1.13 | v4.48,6 4.48,3.68 3.81,3.02 X1.2
  Bottom 0.254: v4.48,6 4,6.48 4,10.03 v5.08,11.11
PW_CV1  (via drill 0.33)
  Top 0.254: v5.08,40.32 5.05,40.32 IC4.13 | v4.48,35.21 4.48,32.89 3.81,32.23 X2.2
  Bottom 0.254: v4.48,35.21 4,35.69 4,39.24 v5.08,40.32
SAW  (via drill 0.33)
  Top 0.254: v32.98,10.61 32.98,10.64 22.23,10.64 21.16,9.57 IC2.7 21.16,8.21 21.43,7.94 v21.91,7.94 | 37.94,10.64 34.37,10.64 v34.33,10.6 | v41.59,10.6 41.55,10.64 37.94,10.64 | 35.1 37.94,10.64 | X1.9 21.91,1.59 21.91,3.49 | v21.91,6.67 21.91,3.49 | 24.2 23.02,3.65 22.86,3.49 21.91,3.49 | IC8.5 42.96,10.51 v43.06,10.61
  Bottom 0.254: v32.98,10.61 34.32,10.61 v34.33,10.6 | v41.59,10.6 41.63,10.64 43.03,10.64 v43.06,10.61 | v21.91,7.94 v21.91,6.67
SAW1  (via drill 0.33)
  Top 0.254: v32.98,39.82 32.98,39.85 22.23,39.85 21.16,38.78 IC6.7 21.16,37.42 21.43,37.15 v21.91,37.15 | 37.94,39.85 34.37,39.85 v34.33,39.81 | v41.59,39.81 41.55,39.85 37.94,39.85 | 73.1 37.94,39.85 | X2.9 21.91,30.8 21.91,32.7 | v21.91,35.88 21.91,32.7 | 66.2 23.02,32.86 22.86,32.7 21.91,32.7 | IC12.5 42.96,39.72 v43.06,39.82
  Bottom 0.254: v32.98,39.82 34.32,39.82 v34.33,39.81 | v41.59,39.81 41.63,39.85 43.03,39.85 v43.06,39.82 | v21.91,37.15 v21.91,35.88
SINE  (via drill 0.33)
  Top 0.254: 20.1 29.69,19.84 29.05,20.48 22.38,20.48 21.91,20 v21.91,16.83 | v21.27,15.56 21.16,15.44 IC2.8 21.16,13.93 v21.59,13.49 | v22.23,9.84 22.86,9.21 | 22.86,9.21 23.02,9.05 | 22.86,9.21 23.34,8.73 23.34,7.46 24.13,6.67 X1.10
  Bottom 0.254: v21.91,16.83 21.91,16.19 v21.27,15.56 | v21.59,13.49 21.59,10.48 v22.23,9.84
SINE1  (via drill 0.33)
  Top 0.254: 63.1 29.69,49.05 29.05,49.69 22.38,49.69 21.91,49.21 v21.91,46.04 | v21.27,44.77 21.16,44.65 IC6.8 21.16,43.13 v21.59,42.7 | v22.23,39.05 22.86,38.42 | 22.86,38.42 23.02,38.26 | 22.86,38.42 23.34,37.94 23.34,36.67 24.13,35.88 X2.10
  Bottom 0.254: v21.91,46.04 21.91,45.4 v21.27,44.77 | v21.59,42.7 21.59,39.69 v22.23,39.05
SS1_TRIM_L  (via drill 0.33)
  Top 0.254: 32.2 v37.94,3.71 | v37.94,3.71 37.94,3.69 v37.94,3.71
  Bottom 0.254: v37.94,3.71 37.94,2.7 X1.16
SS1_TRIM_L1  (via drill 0.33)
  Top 0.254: 87.2 v37.94,32.92 | v37.94,32.92 37.94,32.9 v37.94,32.92
  Bottom 0.254: v37.94,32.92 37.94,31.91 X2.16
SS1_TRIM_R  (via drill 0.33)
  Top 0.254: 38.2 35.6,17.04 IC3.8 35.6,13.93 36.04,13.49 v36.2,13.49 | v39.05,10 39.21,9.84 39.21,4.6 38.89,4.29 v38.89,4.3
  Bottom 0.254: v36.2,13.49 36.67,13.02 36.67,12.38 v39.05,10 | v38.89,4.3 38.89,3.67 41.29,1.27 X1.17
SS1_TRIM_R1  (via drill 0.33)
  Top 0.254: 74.2 35.6,46.25 IC9.8 35.6,43.13 36.04,42.7 v36.2,42.7 | v39.05,39.21 39.21,39.05 39.21,33.81 38.89,33.5 v38.89,33.52
  Bottom 0.254: v36.2,42.7 36.67,42.23 36.67,41.59 v39.05,39.21 | v38.89,33.52 38.89,32.88 41.29,30.48 X2.17
SS2_TRIM_L  (via drill 0.33)
  Top 0.254: 48.1 35.4,6.99 35.56,7.14 35.88,7.14 36.35,6.67 v36.35,4.45
  Bottom 0.254: v36.35,4.45 36.04,4.13 36.04,3.02 X1.14
SS2_TRIM_L1  (via drill 0.33)
  Top 0.254: 82.1 35.4,36.2 35.56,36.35 35.88,36.35 36.35,35.88 v36.35,33.66
  Bottom 0.254: v36.35,33.66 36.04,33.34 36.04,32.23 X2.14
SS2_TRIM_R  (via drill 0.33)
  Top 0.254: 46.2 29.69,3.97 30,3.65 36.99,3.65 v36.99,3.81 36.99,6.83 35.6,8.21 IC3.7
  Bottom 0.254: X1.15 36.99,1.31 v36.99,3.81
SS2_TRIM_R1  (via drill 0.33)
  Top 0.254: 80.2 29.69,33.18 30,32.86 36.99,32.86 v36.99,33.02 36.99,36.04 35.6,37.42 IC9.7
  Bottom 0.254: X2.15 36.99,30.52 v36.99,33.02
SUB_SAW_1  (via drill 0.33)
  Top 0.254: C3.2 41.2 30.8,13.76 | 30.8,13.76 30.96,13.76 31.54,13.76 31.75,13.97 31.75,14.53 IC3.14 | 49.1 31.91,6.99 31.75,7.14 v30.8,7.14 v30.8,4.29 | v30.8,13.43 30.8,13.76
  Bottom 0.254: v30.8,13.43 v30.8,7.14 | X1.13 30.8,2.22 v30.8,4.29
SUB_SAW_2  (via drill 0.33)
  Top 0.254: IC3.1 31.7,9.57 31.54,9.74 44.2 C4.2 26.57,9.74 26.35,9.53 v26.35,7.68 | v26.35,7.68 26.35,7.66 v26.35,7.68 | v26.04,6.51 26.04,4.29 v26.99,3.33
  Bottom 0.254: v26.35,7.68 26.04,7.36 v26.04,6.51 | X1.12 29.18,1.14 v26.99,3.33
SUB_SAW_3  (via drill 0.33)
  Top 0.254: C19.2 77.2 30.8,42.97 | 30.8,42.97 30.96,42.97 31.54,42.97 31.75,43.18 31.75,43.74 IC9.14 | 83.1 31.91,36.2 31.75,36.35 v30.8,36.35 v30.8,33.5 | v30.8,42.64 30.8,42.97
  Bottom 0.254: v30.8,42.64 v30.8,36.35 | X2.13 30.8,31.43 v30.8,33.5
SUB_SAW_4  (via drill 0.33)
  Top 0.254: IC9.1 31.7,38.78 31.54,38.95 78.2 C21.2 26.57,38.95 26.35,38.73 v26.35,36.89 | v26.35,36.89 26.35,36.87 v26.35,36.89 | v26.04,35.72 26.04,33.5 v26.99,32.54
  Bottom 0.254: v26.35,36.89 26.04,36.57 v26.04,35.72 | X2.12 29.18,30.35 v26.99,32.54
SUB_SQR_1  (via drill 0.33)
  Top 0.254: v40.64,10 40.01,10 39.69,9.68 v39.69,3.71 39.69,3.69 | 29.2 C2.2 37.36,18.95 37.15,18.73 37.15,16.51 37.94,15.72 39.85,15.72 40.36,15.21 IC8.14 40.36,13.18 v40.64,12.9
  Bottom 0.254: v40.64,12.9 v40.64,10 | v39.69,3.71 40.7,2.7 43.03,2.7 43.04,2.68 X1.18
SUB_SQR_2  (via drill 0.33)
  Top 0.254: 43.34,3.65 30.2 | 41.12,3.65 40.48,3.65 40.16,3.97 40.16,7.78 40.36,7.97 IC8.1 | 41.12,3.65 43.34,3.65 | C1.2 41.12,3.65 | 43.34,3.65 44.45,3.65 v44.45,3.71
  Bottom 0.254: X1.19 46.97,1.19 v44.45,3.71
SUB_SQR_3  (via drill 0.33)
  Top 0.254: v40.64,39.21 40.01,39.21 39.69,38.89 v39.69,32.92 39.69,32.9 | 71.2 C18.2 37.36,48.16 37.15,47.94 37.15,45.72 37.94,44.93 39.85,44.93 40.36,44.42 IC12.14 40.36,42.39 v40.64,42.11
  Bottom 0.254: v40.64,42.11 v40.64,39.21 | v39.69,32.92 40.7,31.91 43.03,31.91 43.04,31.89 X2.18
SUB_SQR_4  (via drill 0.33)
  Top 0.254: 43.34,32.86 72.2 | 41.12,32.86 40.48,32.86 40.16,33.18 40.16,36.99 40.36,37.18 IC12.1 | 41.12,32.86 43.34,32.86 | C14.2 41.12,32.86 | 43.34,32.86 44.45,32.86 v44.45,32.92
  Bottom 0.254: X2.19 46.97,30.4 v44.45,32.92
SYMMETRY  (via drill 0.33)
  Top 0.254: 16.2 15.24,13.18 14.92,12.86 11.91,12.86 v11.83,12.94 | v11.75,10 11.43,9.68 v11.43,4.13
  Bottom 0.254: v11.83,12.94 11.83,10.08 v11.75,10 | v11.43,4.13 X1.5
SYMMETRY1  (via drill 0.33)
  Top 0.254: 59.2 15.24,42.39 14.92,42.07 11.91,42.07 v11.83,42.15 | v11.75,39.21 11.43,38.89 v11.43,33.34
  Bottom 0.254: v11.83,42.15 11.83,39.29 v11.75,39.21 | v11.43,33.34 X2.5
TRIANGLE  (via drill 0.33)
  Top 0.254: v16.51,16.51 17.26,15.76 IC2.14 17.26,13.81 v16.35,12.9 | v16.51,17.94 16.51,19.84 16.83,20.16 17.62,20.16 | 17.62,20.16 20.48,20.16 20.8,19.84 18.2 | 17.1 17.62,20 17.62,20.16 | v16.35,9.53 16.35,2.38 | 16.35,2.38 16.35,2.22 | 16.35,2.38 16.35,1.31 X1.7
  Bottom 0.254: v16.51,16.51 v16.51,17.94 | v16.35,12.9 v16.35,9.53
TRIANGLE1  (via drill 0.33)
  Top 0.254: v16.51,45.72 17.26,44.97 IC6.14 17.26,43.02 v16.35,42.11 | v16.51,47.15 16.51,49.05 16.83,49.37 17.62,49.37 | 17.62,49.37 20.48,49.37 20.8,49.05 61.2 | 60.1 17.62,49.21 17.62,49.37 | v16.35,38.73 16.35,31.59 | 16.35,31.59 16.35,31.43 | 16.35,31.59 16.35,30.52 X2.7
  Bottom 0.254: v16.51,45.72 v16.51,47.15 | v16.35,42.11 v16.35,38.73

## Text on the board
tNames: 4VOB | 4VOB
bNames: Waveshaper / v2.3 / Dec 24 | Sub oscillator | Pulse VCA | PW CV | Pulse | DCO in | Symmetry | In center | Triangle | Saw inv | Saw | Sine | -5V | Saw 2 | Saw 1 | Saw 2 / match | Saw 1 / match | Sqr 1 | Sqr 2 | +12V | AGND | -12V | Waveshaper / v2.3 / Dec 24 | Sub oscillator | Pulse VCA | PW CV | Pulse | DCO in | Symmetry | In center | Triangle | Saw inv | Saw | Sine | -5V | Saw 2 | Saw 1 | Saw 2 / match | Saw 1 / match | Sqr 1 | Sqr 2 | +12V | AGND | -12V